# Altium PCB PCB2.PcbDoc
Units mm, origin at the board's own origin, x right, y up, seen from the top; angles counter-clockwise.
Board outline 227.61 x 40.77 mm, 4 copper layers (Top Layer, Layer 1, Layer 2, Bottom Layer), stack 0.467 mm thick; 71 components, 58 nets, 244 pads, 87 vias.
Unrouted connection lines stored in the file: 1.
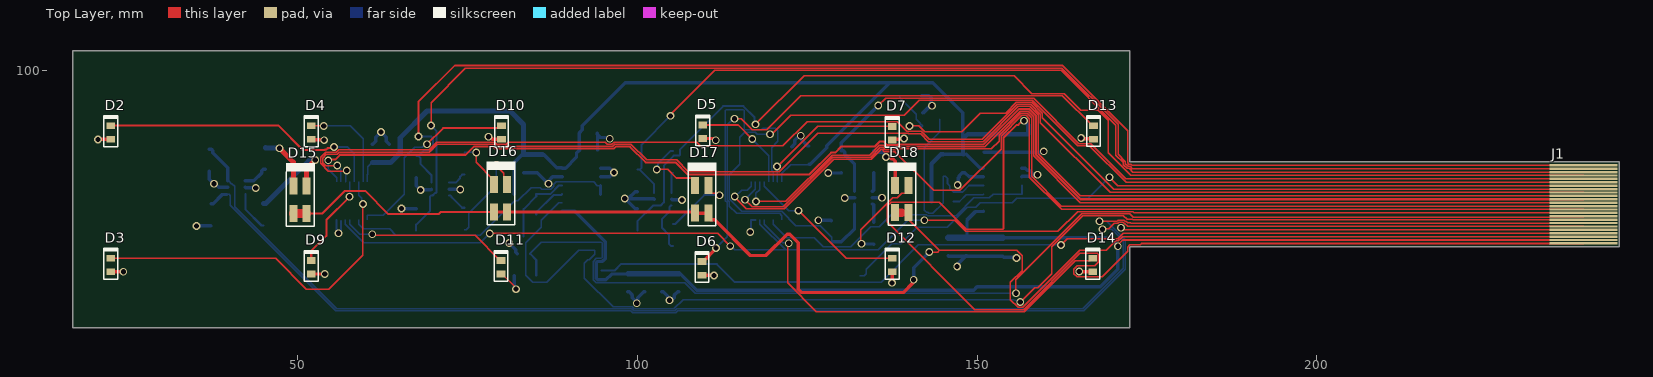
[diagram p0: Top Layer view]
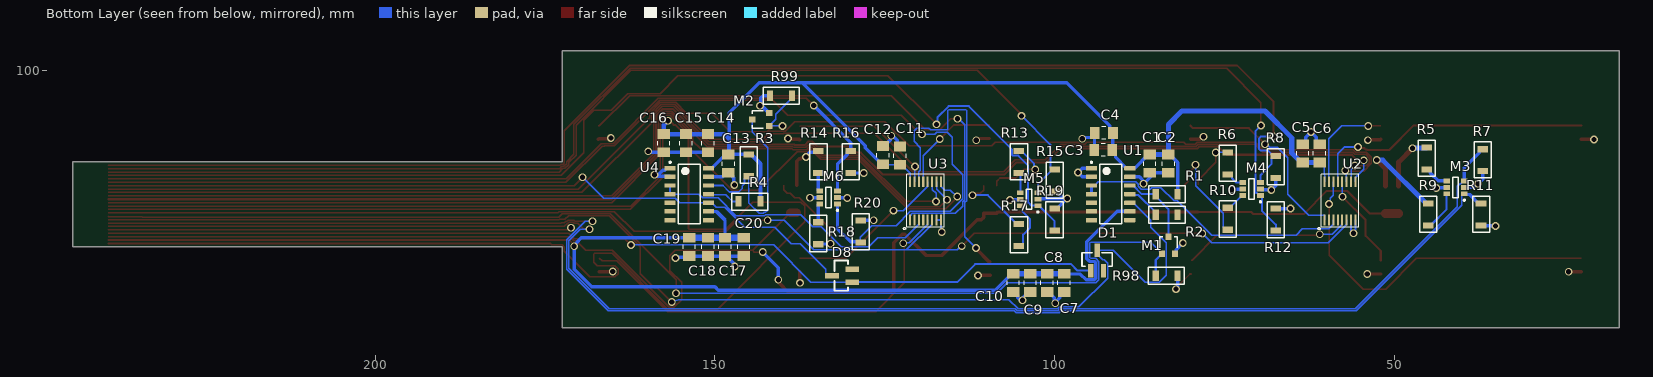
[diagram p1: Bottom Layer view, seen from below]
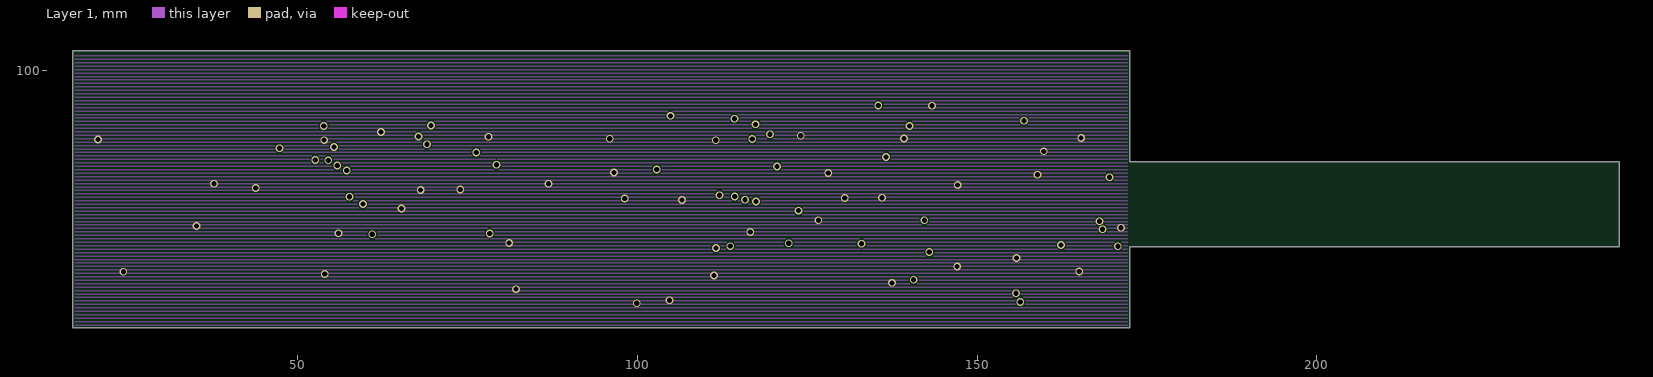
[diagram p2: Layer 1]
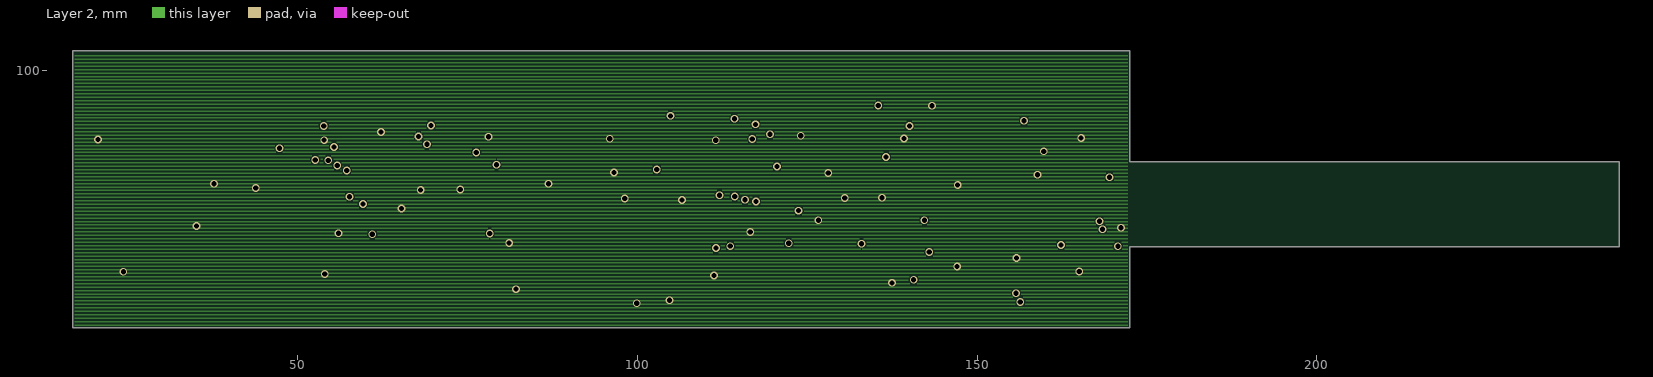
[diagram p3: Layer 2]
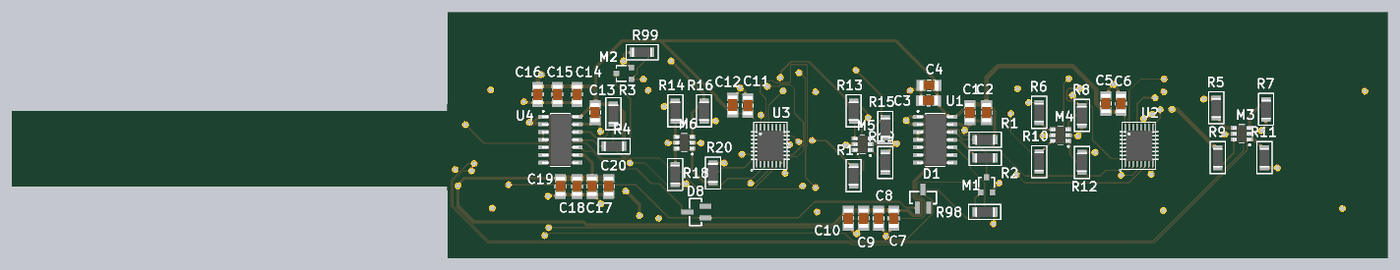
[diagram p4: 3D render of the assembled board from below, using the file's embedded part models]

## Layer stack, top to bottom
Top Stiffener: core 0.1, Core-009, Dk 4.5
Top Solder: solder mask 0.05, FC-001, Dk 4
Top Solder: solder mask 0.012, FC-001, Dk 4
Top Solder: solder mask 0.012, FC-001, Dk 4
Top Solder: solder mask 0.0127, Solder Resist, Dk 3.3
Top Layer: signal copper 0.035
Adhesive 1: prepreg 0.013, PP-006, Dk 4.1
Polymide: core 0.025, Core-009, Dk 4.5
Layer 1: signal copper 0.035
Adhesive 2: prepreg 0.013, PP-006, Dk 4.1
Dielectric 1: core 0.025, Core-009, Dk 4.5
Adhesive 3: prepreg 0.013, PP-006, Dk 4.1
Layer 2: signal copper 0.035
Dielectric 2: prepreg 0.025, PP-006, Dk 4.1
Adhesive 4: prepreg 0.013, PP-006, Dk 4.1
Bottom Layer: signal copper 0.035
Bottom PI Coverlay: solder mask 0.012, FC-001, Dk 4
Bottom PI Coverlay: solder mask 0.012, FC-001, Dk 4
Bottom PI Coverlay: solder mask 0.05, FC-001, Dk 4
Bottom Stiffener: core 0.1, Core-009, Dk 4.5

## Board outline
16.891,62.103 172.466,62.103 172.466,74 244.5,74 244.5,86.5 234,86.5 172.466,86.5 172.466,102.87 16.891,102.87
board region "Layer Stack Region 2": 244.5,86.5 234,86.5 234,74 244.5,74
board region "Default Layer Stack Region": 16.891,62.103 172.466,62.103 172.466,102.87 16.891,102.87
board region "Layer Stack Region 1": 172.466,74 234,74 234,86.5 172.466,86.5

## Design rules (kind name [scope] priority, off if disabled: settings)
BoardOutlineClearance [All] p1: gap=0.2 ignorepadtopadclearanceinfootprint=FALSE except(0: Track-SplitContinuation)
Clearance [All] p1: gap=0.102 ignorepadtopadclearanceinfootprint=TRUE except(0.127: Arc-Via Track-Via SMDPad-Via THPad-Via Via-Via Via-Fill Via-Poly Via-Region Via-Text; 0.254: Arc-Hole Track-Hole SMDPad-Hole THPad-Hole Via-Hole Fill-Hole Poly-Hole Region-Hole Text-Hole)
ComponentClearance [All] p1: gap=0.102 collisioncheckmode=3 verticalgap=0.102 showdistances=TRUE
DiffPairsRouting [All] p1: maxlimit=0.102 minlimit=0.102 mostfreqgap=0.102 toplayer_minwidth=0.102 toplayer_maxwidth=1816.048 toplayer_prefwidth=0.102 midlayer1_minwidth=0.102 midlayer1_maxwidth=1816.048 midlayer1_prefwidth=0.102 midlayer2_minwidth=0.102 midlayer2_maxwidth=1816.048 midlayer2_prefwidth=0.102 bottomlayer_minwidth=0.102 bottomlayer_maxwidth=1816.048 bottomlayer_prefwidth=0.102 substack1={5583BB25-6BBB-4077-B990-A626FA35176B} toplayer_{5583bb25-6bbb-4077-b990-a626fa35176b}_minwidth=0.381 toplayer_{5583bb25-6bbb-4077-b990-a626fa35176b}_maxwidth=0.381 toplayer_{5583bb25-6bbb-4077-b990-a626fa35176b}_prefwidth=0.381 midlayer1_{5583bb25-6bbb-4077-b990-a626fa35176b}_minwidth=0.381 midlayer1_{5583bb25-6bbb-4077-b990-a626fa35176b}_maxwidth=0.381 midlayer1_{5583bb25-6bbb-4077-b990-a626fa35176b}_prefwidth=0.381 midlayer2_{5583bb25-6bbb-4077-b990-a626fa35176b}_minwidth=0.381 midlayer2_{5583bb25-6bbb-4077-b990-a626fa35176b}_maxwidth=0.381 midlayer2_{5583bb25-6bbb-4077-b990-a626fa35176b}_prefwidth=0.381 bottomlayer_{5583bb25-6bbb-4077-b990-a626fa35176b}_minwidth=0.381 bottomlayer_{5583bb25-6bbb-4077-b990-a626fa35176b}_maxwidth=0.381 bottomlayer_{5583bb25-6bbb-4077-b990-a626fa35176b}_prefwidth=0.381 substack2={EBE5391E-56E2-4C1D-A29B-103A0F1B4C26} toplayer_{ebe5391e-56e2-4c1d-a29b-103a0f1b4c26}_minwidth=0.381 toplayer_{ebe5391e-56e2-4c1d-a29b-103a0f1b4c26}_maxwidth=0.381 toplayer_{ebe5391e-56e2-4c1d-a29b-103a0f1b4c26}_prefwidth=0.381 midlayer1_{ebe5391e-56e2-4c1d-a29b-103a0f1b4c26}_minwidth=0.381 midlayer1_{ebe5391e-56e2-4c1d-a29b-103a0f1b4c26}_maxwidth=0.381 midlayer1_{ebe5391e-56e2-4c1d-a29b-103a0f1b4c26}_prefwidth=0.381 midlayer2_{ebe5391e-56e2-4c1d-a29b-103a0f1b4c26}_minwidth=0.381 midlayer2_{ebe5391e-56e2-4c1d-a29b-103a0f1b4c26}_maxwidth=0.381 midlayer2_{ebe5391e-56e2-4c1d-a29b-103a0f1b4c26}_prefwidth=0.381 bottomlayer_{ebe5391e-56e2-4c1d-a29b-103a0f1b4c26}_minwidth=0.381 bottomlayer_{ebe5391e-56e2-4c1d-a29b-103a0f1b4c26}_maxwidth=0.381 bottomlayer_{ebe5391e-56e2-4c1d-a29b-103a0f1b4c26}_prefwidth=0.381 substack3={3CFEAB7B-F632-4D68-969C-E962D5EEF7A6} toplayer_{3cfeab7b-f632-4d68-969c-e962d5eef7a6}_minwidth=0.381 toplayer_{3cfeab7b-f632-4d68-969c-e962d5eef7a6}_maxwidth=0.381 toplayer_{3cfeab7b-f632-4d68-969c-e962d5eef7a6}_prefwidth=0.381 midlayer1_{3cfeab7b-f632-4d68-969c-e962d5eef7a6}_minwidth=0.381 midlayer1_{3cfeab7b-f632-4d68-969c-e962d5eef7a6}_maxwidth=0.381 midlayer1_{3cfeab7b-f632-4d68-969c-e962d5eef7a6}_prefwidth=0.381 midlayer2_{3cfeab7b-f632-4d68-969c-e962d5eef7a6}_minwidth=0.381 midlayer2_{3cfeab7b-f632-4d68-969c-e962d5eef7a6}_maxwidth=0.381 midlayer2_{3cfeab7b-f632-4d68-969c-e962d5eef7a6}_prefwidth=0.381 bottomlayer_{3cfeab7b-f632-4d68-969c-e962d5eef7a6}_minwidth=0.381 bottomlayer_{3cfeab7b-f632-4d68-969c-e962d5eef7a6}_maxwidth=0.381 bottomlayer_{3cfeab7b-f632-4d68-969c-e962d5eef7a6}_prefwidth=0.381 substack4={7D3F5522-6F84-4533-BB2A-A3B8BDBF7E25} toplayer_{7d3f5522-6f84-4533-bb2a-a3b8bdbf7e25}_minwidth=0.381 toplayer_{7d3f5522-6f84-4533-bb2a-a3b8bdbf7e25}_maxwidth=0.381 toplayer_{7d3f5522-6f84-4533-bb2a-a3b8bdbf7e25}_prefwidth=0.381 midlayer1_{7d3f5522-6f84-4533-bb2a-a3b8bdbf7e25}_minwidth=0.381 midlayer1_{7d3f5522-6f84-4533-bb2a-a3b8bdbf7e25}_maxwidth=0.381 midlayer1_{7d3f5522-6f84-4533-bb2a-a3b8bdbf7e25}_prefwidth=0.381 midlayer2_{7d3f5522-6f84-4533-bb2a-a3b8bdbf7e25}_minwidth=0.381 midlayer2_{7d3f5522-6f84-4533-bb2a-a3b8bdbf7e25}_maxwidth=0.381 midlayer2_{7d3f5522-6f84-4533-bb2a-a3b8bdbf7e25}_prefwidth=0.381 bottomlayer_{7d3f5522-6f84-4533-bb2a-a3b8bdbf7e25}_minwidth=0.381 bottomlayer_{7d3f5522-6f84-4533-bb2a-a3b8bdbf7e25}_maxwidth=0.381 bottomlayer_{7d3f5522-6f84-4533-bb2a-a3b8bdbf7e25}_prefwidth=0.381 substack5={1F673AEE-C4FD-4919-8B33-ACA80A65BA25} toplayer_{1f673aee-c4fd-4919-8b33-aca80a65ba25}_minwidth=0.381 toplayer_{1f673aee-c4fd-4919-8b33-aca80a65ba25}_maxwidth=0.381 toplayer_{1f673aee-c4fd-4919-8b33-aca80a65ba25}_prefwidth=0.381 midlayer1_{1f673aee-c4fd-4919-8b33-aca80a65ba25}_minwidth=0.381 midlayer1_{1f673aee-c4fd-4919-8b33-aca80a65ba25}_maxwidth=0.381 midlayer1_{1f673aee-c4fd-4919-8b33-aca80a65ba25}_prefwidth=0.381 midlayer2_{1f673aee-c4fd-4919-8b33-aca80a65ba25}_minwidth=0.381 midlayer2_{1f673aee-c4fd-4919-8b33-aca80a65ba25}_maxwidth=0.381 midlayer2_{1f673aee-c4fd-4919-8b33-aca80a65ba25}_prefwidth=0.381 bottomlayer_{1f673aee-c4fd-4919-8b33-aca80a65ba25}_minwidth=0.381 bottomlayer_{1f673aee-c4fd-4919-8b33-aca80a65ba25}_maxwidth=0.381 bottomlayer_{1f673aee-c4fd-4919-8b33-aca80a65ba25}_prefwidth=0.381 maxuncoupledlength=12.7
Height [All] p1: minheight=0 maxheight=1816.048 prefheight=12.7
HoleSize [All] p1: absolutevalues=TRUE maxlimit=6.3 minlimit=0.2 maxpercent=80.000 minpercent=20.000
HoleToHoleClearance [All] p1: gap=0.254 allowstackedmicrovias=FALSE
MinimumAnnularRing [All] p1: minimumring=0.152
MinimumSolderMaskSliver [All] p1: minsoldermaskwidth=0.152
PlaneClearance [All] p1: clearance=0.102
PlaneConnect PlaneConnectPowerPads [InPadClass('PowerPads')] p1: planeconnectstyle=Direct reliefexpansion=0.508 reliefentries=4 reliefconductorwidth=0.254 reliefairgap=0.254
PlaneConnect [All] p2: pad.planeconnectstyle=Relief pad.reliefexpansion=0.3 pad.reliefentries=4 pad.reliefconductorwidth=0.102 pad.reliefairgap=0.102 via.planeconnectstyle=Direct via.reliefexpansion=0.3 via.reliefentries=4 via.reliefconductorwidth=0.127 via.reliefairgap=0.127
PolygonConnect PolygonConnectPowerPads [All vs (InPadClass('PowerPads'))] p1: connectstyle=Direct reliefconductorwidth=0.254 reliefentries=4 polygonreliefangle="90 Angle" airgapwidth=0.254
PolygonConnect [All] p2: thpad.connectstyle=Relief thpad.reliefconductorwidth=0.102 thpad.reliefentries=4 thpad.polygonreliefangle="90 Angle" thpad.airgapwidth=0.102 smdpad.connectstyle=Relief smdpad.reliefconductorwidth=0.102 smdpad.reliefentries=4 smdpad.polygonreliefangle="90 Angle" smdpad.airgapwidth=0.102 via.connectstyle=Direct via.reliefconductorwidth=0.127 via.reliefentries=4 via.polygonreliefangle="90 Angle" via.airgapwidth=0.127
RoutingVias [All] p1: holewidth=0.2 width=0.45 viastyle="Through Hole" minholewidth=0.2 minwidth=0.45 maxholewidth=6.3 maxwidth=6.55
SilkToSilkClearance [All] p1: silktosilkclearance=0.127
SilkToSolderMaskClearance [IsPad] p1: minsilkscreentomaskgap=0.127 clearancetoexposedcopper=TRUE
SolderMaskExpansion [All] p1: expansion=0.051 istentingtop=FALSE
UnRoutedNet [All] p1: checkbadconnections=TRUE
Width Width_4mil [All] p1: maxlimit=25.4 minlimit=0.102 preferedwidth=0.102 substack1={5583BB25-6BBB-4077-B990-A626FA35176B} substack2={EBE5391E-56E2-4C1D-A29B-103A0F1B4C26} substack3={3CFEAB7B-F632-4D68-969C-E962D5EEF7A6} substack4={7D3F5522-6F84-4533-BB2A-A3B8BDBF7E25} substack5={1F673AEE-C4FD-4919-8B33-ACA80A65BA25} minimp=50.000000 maximp=50.000000 favimp=50.000000
19 further rules are at their usual default settings.

## Classes and differential pairs
component class MultiChannelFlex: C1 C2 C3 C4 C5 C6 C7 C8 C9 C10 C11 C12 C13 C14 C15 C16 C17 C18 C19 C20 D1 D2 D3 D4 D5 D6 D7 D9 D10 D11 D12 D13 D14 J1 M1 M2 R1 R2 R3 R4 R98 R99 U1 U2 U3 U4
component class MultiChannelFlex_LED: D15 D16 D17 D18 M3 M4 M5 M6 R5 R6 R7 R8 R9 R10 R11 R12 R13 R14 R15 R16 R17 R18 R19 R20

## Components (designator, comment, footprint, x,y, rotation, side; value= is the part's Value field where it differs from the comment)
C1 "0.1uF" CAPC3216X180N 86,86.25 r90 bottom value="0.10 μF"
C2 "0.1uF" CAPC3216X180N 83.25,86.25 r270 bottom value="0.10 μF"
C3 "10uF" CAPC3216X180N 92.836,88.25 r0 bottom
C4 "10uF" CAPC3216X180N 92.75,90.75 r0 bottom
C5 "0.1uF" CAPC3216X180N 63.5,87.75 r90 bottom value="0.10 μF"
C6 "10uF" CAPC3216X180N 61,87.75 r90 bottom
C7 "0.1uF" CAPC3216X180N 98.6,68.71 r270 bottom value="0.10 μF"
C8 "0.1uF" CAPC3216X180N 101.1,68.71 r270 bottom value="0.10 μF"
C9 "10uF" CAPC3216X180N 103.6,68.71 r270 bottom
C10 "10uF" CAPC3216X180N 106.1,68.71 r270 bottom
C11 "0.1uF" CAPC3216X180N 122.744,87.408 r90 bottom value="0.10 μF"
C12 "10uF" CAPC3216X180N 125.25,87.5 r90 bottom
C13 "0.1uF" CAPC3216X180N 148,86.25 r90 bottom value="0.10 μF"
C14 "0.1uF" CAPC3216X180N 151,89.25 r270 bottom value="0.10 μF"
C15 "10uF" CAPC3216X180N 154.25,89.25 r270 bottom
C16 "10uF" CAPC3216X180N 157.5,89.25 r270 bottom
C17 "0.1uF" CAPC3216X180N 148.5,74 r270 bottom value="0.10 μF"
C18 "0.1uF" CAPC3216X180N 151,74 r270 bottom value="0.10 μF"
C19 "10uF" CAPC3216X180N 153.75,74 r270 bottom
C20 "10uF" CAPC3216X180N 145.75,74 r270 bottom
D1 "BAT54LT1G" BAT54LT1 93.75,72 r180 bottom
D2 "HSD9-B170" HSD9-B170 22.5,91 r90 top
D3 "HSD9-B170" HSD9-B170 22.5,71.5 r90 top
D4 "HSD9-B170" HSD9-B170 52,91 r90 top
D5 "HSD9-B170" HSD9-B170 109.608,91.112 r90 top
D6 "HSD9-B170" HSD9-B170 109.5,71 r90 top
D7 "HSD9-B170" HSD9-B170 137.495,90.894 r90 top
D8 "BAT54LT1G" BAT54LT1 131.25,69.75 r90 bottom
D9 "HSD9-B170" HSD9-B170 52,71.168 r90 top
D10 "HSD9-B170" HSD9-B170 80,91 r90 top
D11 "HSD9-B170" HSD9-B170 79.924,71.178 r90 top
D12 "HSD9-B170" HSD9-B170 137.5,71.5 r90 top
D13 "HSD9-B170" HSD9-B170 167.125,91.003 r90 top
D14 "HSD9-B170" HSD9-B170 167,71.5 r90 top
D15 "SMT735D/850D" SMT735D_850D 49.369,82.569 r0 top
D16 "SMT735D/850D" SMT735D_850D 78.89,82.787 r0 top
D17 "SMT735D/850D" SMT735D_850D 108.5,82.619 r0 top
D18 "SMT735D/850D" SMT735D_850D 137.931,82.678 r0 top
J1 "FPC Connector" PCBComponent_1 240.863,74.325 r90 top
M1 "2N7002" STM-SOT-23-3_V 83.25,74.25 r180 bottom
M2 "2N7002" STM-SOT-23-3_V 143.25,92.75 r90 bottom
M3 "NDC7002N" FAIR-MA06A_V 41,82.75 r180 bottom
M4 "NDC7002N" FAIR-MA06A_V 71,82.5 r180 bottom
M5 "NDC7002N" FAIR-MA06A_V 103.75,81 r180 bottom
M6 "NDC7002N" FAIR-MA06A_V 133.25,81.25 r180 bottom
R1 "1k" R1206 83.5,81.75 r180 bottom
R2 "1k" R1206 83.5,78.75 r180 bottom
R3 "1k" R1206 145,86 r90 bottom
R4 "1k" R1206 144.9,80.675 r180 bottom
R5 "26.1" R1206 45.25,87 r90 bottom value=26.1Ω
R6 "26.1" R1206 74.549,86.25 r90 bottom value=26.1Ω
R7 "1k" R1206 37,86.75 r90 bottom
R8 "1k" R1206 67.476,85.75 r90 bottom
R9 "36" R1206 45,78.75 r90 bottom
R10 "36" R1206 74.524,78.135 r270 bottom
R11 "1k" R1206 37.25,78.75 r90 bottom
R12 "1k" R1206 67.451,78 r270 bottom
R13 "26.1" R1206 105.25,86.5 r90 bottom value=26.1Ω
R14 "26.1" R1206 134.75,86.5 r90 bottom value=26.1Ω
R15 "1k" R1206 100,83.75 r90 bottom
R16 "1k" R1206 130,86.5 r90 bottom
R17 "36" R1206 105.25,75.75 r90 bottom
R18 "36" R1206 134.75,76 r270 bottom
R19 "1k" R1206 100,78 r270 bottom
R20 "1k" R1206 128.5,76.25 r270 bottom
R98 "1k" R1206 83.5,69.75 r0 bottom
R99 "1k" R1206 140.25,96.25 r180 bottom
U1 "IVC102" D0014A_M 91.75,81.75 r180 bottom
U2 "8x1 Analog MUX TSSOP16" TSSOP-16 58,80.75 r180 bottom
U3 "8x1 Analog MUX TSSOP16" TSSOP-16 119,80.75 r180 bottom
U4 "IVC102" D0014A_M 153.75,81.75 r180 bottom

## Footprints (in the part's own frame and the unit in brackets; to place one, negate y for a bottom-side part, rotate by r counter-clockwise, add the part's x,y. Pads: shape width x height; smd on the part's side, far side on the other; paste and mask are expansions set on the pad)
BAT54LT1 [mm]
  rect 0.8x2 smd: 1(-0.95,-1.503) 2(0.95,-1.503) 3(-0.001,1.503)
  silkscreen extent -2.22,-0.86 2.23,1.14
CAPC3216X180N [mm]
  rect 1.44x1.82 smd: 1(-1.336,0) 2(1.336,0)
  silkscreen extent -0.29,-0.9 0.29,0.9, body extent -1.6,-0.8 1.6,0.8, height 1.8
D0014A_M [mm] "SOIC, 14-Leads, Body 8.75x4mm, Pitch 1.27mm, IPC Low Density"
  rrect15% 1.65x0.65 smd: 1(-2.825,3.81) 2(-2.825,2.54) 3(-2.825,1.27) 4(-2.825,0) 5(-2.825,-1.27) 6(-2.825,-2.54) 7(-2.825,-3.81) 8(2.825,-3.81) 9(2.825,-2.54) 10(2.825,-1.27) 11(2.825,0) 12(2.825,1.27) 13(2.825,2.54) 14(2.825,3.81)
  silkscreen extent -2.95,-4.38 1.6,4.81, body extent -3.02,-4.32 3.02,4.32, height 1.59
FAIR-MA06A_V [mm] "SOT23, 6-Leads, Body 3x1.7mm, Pitch 0.95mm"
  rect 1x0.7 smd: 1(1.3,-0.95) 2(1.3,0) 3(1.3,0.95) 4(-1.3,0.95) 5(-1.3,0) 6(-1.3,-0.95)
  silkscreen extent -0.4,-2 1.42,1.5, body extent -1.5,-1.5 1.5,1.5, height 1.1
HSD9-B170 [mm]
  rect 1x1.3 smd: 1(-1.168,0) 2(0.825,0)
  silkscreen extent -2.24,-1.02 2.26,1
PCBComponent_1 [mm]
  rect 0.35x10 smd mask+0: 1(0.175,1.613) 2(0.675,1.613) 3(1.175,1.613) 4(1.675,1.613) 5(2.175,1.613) 6(2.675,1.613) 7(3.175,1.613) 8(3.676,1.613) 9(4.175,1.613) 10(4.675,1.613) 11(5.175,1.613) 13(6.175,1.613) 14(6.675,1.612) 15(7.175,1.613) 16(7.675,1.613) 17(8.175,1.613) 18(8.676,1.613) 19(9.175,1.613) 20(9.675,1.611) 21(10.176,1.619) 22(10.675,1.613) 23(11.175,1.613)
  rect 0.35x10 smd paste+0 mask+0: 12(5.675,1.613) 24(11.674,1.616)
R1206 [mm]
  rect 0.9x1.55 smd: 1(-1.615,0) 2(1.615,0)
  silkscreen extent -2.62,-1.27 2.69,1.24, body extent -1.6,-0.81 1.6,0.79, height 0.6
SMT735D_850D [mm]
  rect 1.2x2.5 smd: 1(0,-3.658) 2(0,0.381) 3(1.941,-3.655) 4(1.941,0.383)
  silkscreen extent -1.12,-5.51 3.15,3.76
STM-SOT-23-3_V [mm] "SOT23, 3-Leads, Body 3.016x2.8mm, Pitch 0.95mm"
  rect 0.9x0.95 smd: 1(-0.95,-1.25) 2(0.95,-1.25) 3(0,1.25)
  silkscreen extent -1.3,-0.38 1.3,1.25
TSSOP-16 [mm]
  rect 0.3x1.55 smd: 1(-2.275,-2.8) 2(-1.625,-2.8) 3(-0.975,-2.8) 4(-0.325,-2.8) 5(0.325,-2.8) 6(0.975,-2.8) 7(1.625,-2.8) 8(2.275,-2.8) 9(2.275,2.8) 10(1.625,2.8) 11(0.975,2.8) 12(0.325,2.8) 13(-0.325,2.8) 14(-0.975,2.8) 15(-1.625,2.8) 16(-2.275,2.8)
  silkscreen extent -3.25,-4.22 2.76,3.9, body extent -3.2,-2.5 3.2,2.5, height 1.1

## Part data
C1 C2 C5 C7 C8 C11 C13 C14 C17 C18: library part C1206C104K5RAC7210, "1206", Capacitance="0.10 μF", Manufacturer=KEMET, Package=C1206C-EB, Temperature="-55°C to +150°C", Temperature Characteristic=X7R, Temperature Coefficient=15%, Temperature Range High=+150°C, Temperature Range Low=-55°C, Tolerance=0.1, Voltage Rating="50 V", Automotive=Yes, Automotive Grade="Grade 0", Category=Cap, ComponentLink2Description=Datasheet, ComponentLink2URL=https://content.kemet.com/datasheets/KEM_C1007_X8R_ULTRA_150C_SMD.pdf, Device Class L1="Passive Components", Device Class L2=Capacitors, Device Class L3="Ceramic Capacitors", Digikey Description="CAP CER 0.1UF 50V X7R 1206", Height=0.88mm, Ipc Land Pattern Name=CAPC320160X78, Lead Free=Yes, Manufacturer Part Number=C1206C104K5RAC7210, Material=Ceramic, Mouser Description="Multilayer Ceramic Capacitors MLCC - SMD/SMT 50volts 0.1uF X7R 10%", Octopart=https://octopart.com/c1206c104k5rac7210-kemet-3919856, RoHS=TRUE
C3 C4 C6 C9 C10 C12 C15 C16 C19 C20: library part CL31B106KOHNNWE, "1206"
D1 D8: library part BAT54L, "Schottky Barrier Diode, 3-Pin SOT-23, Pb-Free, Tape and Reel", Manufacturer="On Semiconductor", ComponentLink1Description="Manufacturer URL", ComponentLink1URL=http://www.onsemi.com/, ComponentLink2Description=Datasheet, ComponentLink2URL=http://www.onsemi.cn/pub_link/Collateral/BAT54LT1-D.PDF, ComponentLink3Description="Package Specification", ComponentLink3URL=http://www.onsemi.cn/pub_link/Collateral/318-08.PDF, Configuration=Single, DatasheetVersion="Rev. 12", IFSM Max (A)=0.6, Mounting Technology="Surface Mount", PackageDescription="3-Pin Small Outline Transistor, Body 2.92 x 1.3 mm, Pitch 0.95 mm", PackageReference=SOT-23-3-318-08, PackageVersion="Rev. AP, 11/2009", Packing="Tape and Reel", PartNumber=BAT54LT1G, RoHS=TRUE, trr Max (ns)=5
J1: library part 2-1734592-4, "24 Position FPC Connector Contacts, Bottom 0.020\" _0.50mm_ Surface Mount, Right Angle", Package=None, Availability=Unavailable, MF="TE Connectivity", MP=2-1734592-4, Price=None, SnapEDA_Link=https://www.snapeda.com/parts/2-1734592-4/TE%20Connectivity/view-part/4788511/?ref=snap
M1 M2: library part 2N7002-TP, "N-channel 60 V, 1.8 Ohm, 0.35 A STripFET(TM) II Power MOSFET, SOT23", Manufacturer=STMicroelectronics, ComponentLink1Description="Manufacturer URL", ComponentLink1URL=http://www.st.com/, ComponentLink2Description=Datasheet, ComponentLink2URL=http://www.st.com/st-web-ui/static/active/en/resource/technical/document/datasheet/CD00005134.pdf, DatasheetVersion="Rev. 9, 11/2008", Mounting Technology="Surface Mount", PackageDescription="3-Pin SOT23, 3.016 x 2.8 mm Body, 0.95 mm Pitch", PackageReference=SOT-23, PartNumber=2N7002
R1 R2 R3 R4 R7 R8 R11 R12 R15 R16 R19 R20 R98 R99: library part RT1206BRD071KL, "1206 1kOhm"
R5 R6 R13 R14: library part RQ73C2B26R1BTD, "1206 26.1 Ohm", Manufacturer=TE, Package=RQ732B, Power Rating=0.4W, Resistance=26.1Ω, Temperature="-55°C to +155°C", Temperature Coefficient=10ppm/°C, Temperature Range High=+155°C, Temperature Range Low=-55°C, Tolerance=0.1%, Voltage Rating=200V, Automotive=Yes, Automotive Grade="Grade 0", Category=Res, ComponentLink2Description=Datasheet, ComponentLink2URL=https://www.te.com/commerce/DocumentDelivery/DDEController?Action=showdoc&DocId=Data+Sheet%7F1773270-2%7FA%7Fpdf%7FEnglish%7FENG_DS_1773270-2_A.pdf%7F9-2176388-167, Composition="Thin Film", Device Class L1="Passive Components", Device Class L2=Resistors, Device Class L3="Chip SMD Resistors", Height=0.75mm, Ipc Land Pattern Name=RESC310160X60, Lead Free=Yes, Manufacturer Part Number=RQ73C2B26R1BTD, Octopart=https://octopart.com/rq73c2b26r1btd-te+connectivity-93911368, RoHS=TRUE, Series=RQ73
R9 R10 R17 R18: library part RT1206BRD0736RL, "1206 36 Ohm", Manufacturer=Yageo, Max Operating Temperature=155°C, Min Operating Temperature=-55°C, Package Height=0.55mm, Package Length=3.1mm, Package Style=SMTMeter, Package Width=1.6mm, Rated Power Dissipation (P)=250mW, Rated Temperature=70°C, Resistance=36R, Resistor Type="FIXED RESISTOR", Temperature Coefficient=25ppm/°C, Tolerance=0.1%, Working Voltage=200V, Additional Feature="HIGH PRECISION", Category="Chip SMD Resistors", ComponentLink1Description=https://datasheet.ciiva.com:443/pdfs/VipMasterIC/IC/YAGO/YAGO-S-A0008510989/YAGO-S-A0008510989-1.pdf?src-supplier=IHS+Markit, ComponentLink1URL=https://datasheet.ciiva.com:443/pdfs/VipMasterIC/IC/YAGO/YAGO-S-A0008510989/YAGO-S-A0008510989-1.pdf?src-supplier=IHS+Markit, ComponentLink2Description=https://datasheet.ciiva.com/2587/pyu-rt-1-to-0-05-rohs-l-5-2587658.pdf?src-supplier=Digikey, ComponentLink2URL=https://datasheet.ciiva.com/2587/pyu-rt-1-to-0-05-rohs-l-5-2587658.pdf?src-supplier=Digikey, ComponentLink3Description=https://datasheet.ciiva.com/12811/pyu-rt-1-to-0-05-rohs-l-4-12811975.pdf?src-supplier=Mouser, ComponentLink3URL=https://datasheet.ciiva.com/12811/pyu-rt-1-to-0-05-rohs-l-4-12811975.pdf?src-supplier=Mouser, Construction=Chip, Manufacturer Part Number=RT1206BRD0736RL, Mount="Surface Mount", Number of Pins=2, Packaging="Tape and Reel", Pricing 1="1=0.33, 10=0.241, 50=0.1868, 100=0.166, 500=0.1245, 1000=0.10938 (USD)", Reach SVHC Compliant=Yes, RoHS=Yes, RoHS Compliant=Yes, Size Code=1206, Stock 1=9860, Supplier 1=Digikey, Technology="THIN FILM", Termination=Wraparound
U2 U3: library part 74HCT4051PW

## Via types
v1: diameter 1.143, hole 0.762, Top Layer to Bottom Layer, 87 vias

## Nets (pads, with @x,y where several pads share a name; then routed paths per layer and width w, separated by ;. In a path a pad name is that pad's centre, name@x,y a point inside that pad or via, vN(x,y) a via of type N, cw(c..) or ccw(c..) an arc to the next point about the centre after c; other vN are vias at no path point)
1a: D2.2 U2.13 | length 42.1
  Top Layer w0.3: D2.2 47.2,91.825 50.775,88.25 53.954,88.25 54.006,88.302 54.23,88.302 54.467,88.539 55.189,88.539 v1(55.35,88.7)
  Bottom Layer w0.2: U2.13 58.325,87.7
  Bottom Layer w0.3: v1(55.35,88.7) 57.325,88.7 58.325,87.7
1b: D5.2 U3.13 | length 15.5
  Top Layer w0.254: D5.2 114.813,91.937 v1(116.9,89.85)
  Bottom Layer w0.2: v1(116.9,89.85) 119.325,87.425 U3.13
2a: D3.2 U2.14 | length 51.9
  Top Layer w0.2: D3.2 46.75,72.325 51.3,67.775 54.6,67.775 59.6,72.775 v1@59.6,80.075
  Bottom Layer w0.2: U2.14 58.975,81.6 59.42,81.155 59.42,80.48 v1(59.6,80.3)
2b: D6.2 U3.14 | length 42.9
  Top Layer w0.5: D6.2 109.65,71.825 111.55,73.725 v1(111.55,73.825)
  Bottom Layer w0.2: v1(111.55,73.825) 113.2,75.475 113.2,80.543 112.925,80.818 112.925,94.083 113.042,94.2 115.577,94.2 115.694,94.083 115.694,91.317 115.811,91.2 118.25,91.2 118.525,91.475 120.25,91.475 120.675,91.05 120.675,89.525 119.752,88.601 119.752,85.278 119.975,85.054 U3.14
3a: D4.2 U2.15 | length 14.8
  Top Layer w0.2: D4.2 52.025,91.8 v1(53.85,91.8)
  Bottom Layer w0.2: v1(53.85,91.8) 57.725,91.8 59.625,89.9 U2.15
3b: D7.2 U3.15 | length 21.7
  Top Layer w0.2: v1(120.55,85.827) 120.631,85.827 126.524,91.719 D7.2
  Bottom Layer w0.2: v1(120.55,85.827) 120.588,85.789 120.588,83.588 U3.15
3V3: D15.1 D15.3 D16.1 D16.3 D17.1 D17.3 D18.1 D18.3 J1.3 | length 230.8
  Top Layer w0.2: 138.901,79.022 139.711,78.212 144.446,73.477 ; v1(142.95,73.225) 144.195,73.225 144.446,73.477 ; J1.3 171.406,75.5 170.794,74.889 170.369,74.889 168.957,73.477 165.112,73.477 156.712,65.076 156.019,65.076 154.902,66.194 154.902,68.809 156.599,70.506 156.599,72.707 155.829,73.477 144.446,73.477
  Top Layer w0.3: D15.3@51.308,78.913 53.663,78.913 56.973,82.224 59.932,82.224 63.354,78.802 70.733,78.802 71.061,79.129 D16.1
  Top Layer w0.5: D16.1 80.828,79.129 D16.3 108.33,79.132 D17.1 D17.1@108.542,78.919 ; D17.1@108.586,78.964 D17.3 110.441,78.314 110.791,77.964 111.361,77.964 116.6,72.725 118.875,72.725 122.018,75.868 122.432,75.868 123.675,74.625 123.675,67.784 124.184,67.275 139.125,67.275 v1@140.525,68.675
  Top Layer w1.27: D15.1 D15.1 D15.3@51.308,78.913 ; D18.1 137.932,79.022 138.901,79.022
  Bottom Layer w0.5: v1(140.65,69.15) 140.65,70.925 v1(142.95,73.225)
4a: D9.2 U2.12 | length 13.9
  Top Layer w0.3: D9.2 52,73.4 54.225,75.625 54.225,77.95 v1(57.65,81.375)
  Bottom Layer w0.2: v1(57.65,81.375) 57.663,81.388 57.663,83.538 U2.12
4b: D12.2 U3.12 | length 23.8
  Top Layer w0.2: v1(123.725,79.325) 130.725,72.325 D12.2
  Bottom Layer w0.2: U3.12 118.675,82.925 122.275,79.325 v1(123.725,79.325)
5a: D10.2 U2.1 | length 29
  Top Layer w0.3: v1(69.022,89.099) 71.398,91.475 79.65,91.475 D10.2
  Bottom Layer w0.2: U2.1 60.275,78.575 60.325,78.625 62.575,78.625 65.7,81.75 65.7,87.099 67.251,88.65 68.318,88.65 68.767,89.099 v1(69.022,89.099)
5b: D13.2 U3.1 | length 79.5
  Top Layer w0.2: v1(114.275,92.85) 115.306,92.85 116.93,91.227 119.022,91.227 124.046,96.25 162.553,96.25 166.975,91.828 D13.2
  Bottom Layer w0.2: v1@113.902,92.627 113.227,91.952 113.227,80.943 113.502,80.668 113.502,79.989 114.583,78.908 114.602,78.927 120.923,78.927 121.275,78.575 U3.1
6a: D11.2 U2.5 | length 25.1
  Top Layer w0.2: v1(60.975,75.85) 61.15,75.675 76.102,75.675 79.774,72.003 D11.2
  Bottom Layer w0.2: U2.5 57.675,77.325 59.15,75.85 v1(60.975,75.85)
6b: D14.2 U3.5 | length 61.2
  Top Layer w0.2: v1(122.275,74.525) 122.1,74.35 122.1,68.72 126.347,64.473 156.961,64.473 164.413,71.925 166.6,71.925 D14.2
  Bottom Layer w0.2: U3.5 118.675,77.325 121.404,74.597 122.203,74.597 v1(122.275,74.525)
735-S1: J1.6 M3.3 R7.2 | length 229.3
  Top Layer w0.2: v1(168.457,76.59) 168.56,76.693 169.329,76.693 170.134,77.498 170.719,77.498 170.822,77.601 171.484,77.601 171.587,77.498 171.652,77.498 172.15,77 J1.6
  Bottom Layer w0.2: M3.3 39.85,83.7 40.248,83.302 40.323,83.302 40.725,82.9 40.725,79.9 55.723,64.902 99.143,64.902 99.444,64.6 105.504,64.6 105.806,64.902 165.54,64.902 171.498,70.86 171.498,74.902 169.81,76.59 v1(168.457,76.59)
  Bottom Layer w0.508: R7.2 37.325,88.365 37.521,88.169 37.521,87.844 39.7,85.665 M3.3
735-S2: J1.24 M4.3 R8.2 | length 198.5
  Top Layer w0.254: v1@67.775,90.7 67.775,95.325 73.15,100.7 162.543,100.7 172.139,91.104 172.139,86.365 172.331,86.173 172.644,86.173 172.818,85.999 J1.24
  Bottom Layer w0.3: R8.2 R8.2@67.801,87.365 ; v1(67.8,90.25) 69.625,90.25 69.903,89.972 69.903,88.382 69.728,88.206 68.642,88.206 R8.2@67.801,87.365 ; M4.3 69.7,84.558 68.101,86.157 68.101,87.065 R8.2@67.801,87.365
735-S3: J1.22 M5.3 R15.2 | length 160.9
  Top Layer w0.2: v1@104.575,93.2 111.375,100 162.352,100 170.426,91.926 170.426,87.501 171.509,86.417 171.509,86.104 172.07,85.543 172.383,85.543 172.466,85.46 172.926,85 J1.22
  Bottom Layer w0.3: R15.2 R15.2@100.325,85.365 ; M5.3 102.45,83.24 R15.2@100.325,85.365 ; v1(104.85,93.275) 100.625,89.05 100.625,85.665 R15.2@100.325,85.365
735-S4: J1.20 M6.3 R16.2 | length 125
  Top Layer w0.2: v1(135.45,94.8) 136.525,95.875 158.297,95.875 164.969,89.203 166.322,89.203 166.391,89.133 166.718,89.133 171.851,84 J1.20
  Bottom Layer w0.5: M6.3 131.95,86.165 130.525,87.59 130.525,87.915 130.325,88.115 R16.2 130,89.35 v1(135.45,94.8)
850-S1: J1.7 M3.1 R11.2 | length 226.5
  Top Layer w0.2: v1(168,77.775) 168.025,77.8 170.594,77.8 170.697,77.903 171.609,77.903 171.712,77.8 171.875,77.8 172.125,77.55 172.2,77.55 172.225,77.525 172.6,77.525 172.625,77.5 J1.7
  Bottom Layer w0.2: M3.1@39.604,81.704 39.946,81.704 40.1,81.55 40.1,80.098 55.598,64.6 99.018,64.6 99.319,64.298 105.629,64.298 105.931,64.6 165.665,64.6 171.8,70.735 171.8,75.026 169.052,77.775 v1(168,77.775)
  Bottom Layer w0.508: R11.2 37.575,80.365 38.914,81.704 M3.1@39.604,81.704
850-S2: J1.23 M4.1 R12.2 | length 201.2
  Top Layer w0.2: v1(69.625,91.85) 69.625,95.225 74.702,100.302 162.476,100.302 170.727,92.051 170.727,87.626 171.81,86.542 171.81,86.228 172.194,85.844 172.466,85.844 172.508,85.844 172.853,85.5 J1.23
  Bottom Layer w0.3: R12.2 67.451,77.251 69.45,79.25 69.45,81.35 69.65,81.55 M4.1 69.85,81.55 70.198,81.898 70.304,81.898 70.452,82.046 70.452,91.023 v1(69.625,91.85)
850-S3: J1.21 M5.1 R19.2 | length 164.8
  Top Layer w0.2: v1(117.375,92.025) 124.525,99.175 155.424,99.175 158.047,96.552 162.828,96.552 165.255,94.125 167.8,94.125 169.275,92.65 169.275,87.825 172.599,84.501 J1.21
  Bottom Layer w0.3: R19.2 100,77.75 102.3,80.05 M5.1 103.4,80.05 103.885,80.535 103.885,85.96 105.338,87.413 106.129,87.413 106.277,87.561 106.277,88.352 112.625,94.7 115.574,94.7 117.228,93.046 117.228,92.172 v1(117.375,92.025)
850-S4: J1.19 M6.1 R20.2 | length 167.3
  Top Layer w0.2: v1@119.55,90.375 122.55,93.375 139.244,93.375 141.443,95.573 158.137,95.573 164.809,88.902 166.197,88.902 166.266,88.832 166.593,88.832 171.925,83.5 J1.19
  Bottom Layer w0.2: v1(119.5,90.575) 117.669,90.575 117.37,90.873 115.794,90.873 115.044,90.123 115.044,86.119 113.528,84.603 113.528,81.068 115.368,79.228 121.207,79.228 123.334,77.101 126.898,77.101 128.615,75.385 R20.2@128.615,74.75
  Bottom Layer w0.5: R20.2@128.615,74.75 130.025,74.75 131.95,76.675 M6.1
+5V: C1.2 C2.1 C3.1 C4.1 C5.1 C6.1 C11.1 C12.1 C13.2 C14.1 C15.1 C16.1 J1.1 R1.2 R2.2 R3.2 R4.2 U1.14 U2.16 U3.16 U4.14 | length 334
  Top Layer w0.2: 153.875,76.717 153.743,76.585 148.41,76.585 144.421,80.575 137.35,80.575 136.792,80.016 136.792,77.658 149.675,64.775 156.837,64.775 165.088,73.027 167.734,73.027 167.852,72.909 167.852,71.741 167.334,71.224 164.744,71.224 164.226,70.706 164.226,70.044 164.694,69.577 168.384,69.577 172.141,73.333 172.141,73.958 172.466,74.283
  Top Layer w0.25: 172.466,74.283 172.508,74.325 174.015,74.325 174.19,74.5 J1.1
  Top Layer w0.3: 153.875,76.717 153.875,90.025 155.8,91.95 156.072,91.95 156.672,92.55 v1(156.9,92.55)
  Bottom Layer w0.2: U2.16 60.275,84.625 60.35,84.7 60.35,85.794 60.97,86.414 C6.1 ; U3.16 121.275,84.794 122.554,86.072 C11.1 125.158,86.072 C12.1
  Bottom Layer w0.5: R1.2 81.885,86.411 83.06,87.586 C2.1 ; C1.2 86.19,87.586 88.141,85.635 88.85,85.635 U1.14 89.425,85.56 91.03,87.165 91.03,87.78 C3.1 91.457,88.293 91.457,90.707 C4.1 91.884,91.22 91.884,91.834 98.225,98.175 137.15,98.175 ; C12.1 125.44,86.164 127.875,88.599 127.875,88.9 137.15,98.175 ; 147.9,89.4 147.9,89.875 147.9,93.75 143.475,98.175 137.15,98.175
  Bottom Layer w0.508: R3.2 C13.2@147.971,87.615 ; C13.2@148.37,87.615 150.425,85.56 U4.14
  Bottom Layer w0.635: R4.2 143.285,86.225 144.675,87.615 R3.2 ; 147.9,89.4 147.9,87.686 147.971,87.615 C13.2 ; 147.9,89.875 148.611,90.586 C14.1 C15.1 C16.1 157.5,91.943 156.9,92.543 v1(156.9,92.55)
  Bottom Layer w0.75: C6.1 63.69,86.414 65.096,87.82 65.096,90.046 69.025,93.975 81.275,93.975 83.25,92 C2.1 C1.2
-5V: D1.1 D8.1 J1.4 | length 149
  Top Layer w0.2: v1(162.35,74.275) 163.265,75.19 170.669,75.19 171.479,76 J1.4
  Bottom Layer w0.2: D8.1 135.85,68.8 141.325,74.275 v1(162.35,74.275)
  Bottom Layer w0.3: D1.1 96.622,70.497 97.575,71.45 111.7,71.45 114.35,68.8 D8.1
-15V: C7.1 C8.1 C9.1 C10.1 C17.1 C18.1 C19.1 C20.1 J1.2 U1.9 U4.9 | length 197.6
  Top Layer w0.254: v1(170.7,74.09) 170.7,74.275 171.425,75 J1.2
  Bottom Layer w0.5: U1.9 90.812,79.21 95.252,74.77 95.252,72.238 94.862,71.849 94.154,71.849 93.948,71.643 93.948,69.352 94.154,69.146 95.357,69.146 96.207,69.996 98.55,69.996 C7.1 ; C10.1 106.29,70.046 108.709,67.627 149.477,67.627 149.973,68.123 168.123,68.123 170.7,70.7 v1(170.7,74.09) ; C17.1 148.5,77.95 149.751,79.201 150.916,79.201 U4.9
  Bottom Layer w0.508: C19.1 169.639,75.336 170.029,74.946 170.029,74.933 170.7,74.262 v1(170.7,74.09)
  Bottom Layer w0.75: C7.1 C8.1 C9.1 C10.1
  Bottom Layer w1: C20.1 C17.1 C18.1 C19.1
GND: C1.1 C2.2 C3.2 C4.2 C5.2 C6.2 C7.2 C8.2 C9.2 C10.2 C11.2 C12.2 C13.1 C14.2 C15.2 C16.2 C17.2 C18.2 C19.2 C20.2 D2.1 D3.1 D4.1 D5.1 D6.1 D7.1 D9.1 D10.1 D11.1 D12.1 D13.1 D14.1 J1.5 M1.2 M2.2 M3.2 M3.5 M4.2 M4.5 M5.2 M5.5 M6.2 M6.5 R7.1 R8.1 R11.1 R12.1 R15.1 R16.1 R19.1 R20.1 R98.1 R99.1 U1.1 U1.2 U1.13 U2.7 U2.8 U3.7 U3.8 U4.1 U4.2 U4.13 | length 205.3
  Top Layer w0.254: D11.1 80.074,70.009 82.125,67.959 v1(82.125,67.775) ; v1(171.153,76.803) 171.213,76.803 171.515,76.5 J1.5
  Top Layer w0.508: v1(20.625,89.8) 20.641,89.816 22.484,89.816 D2.1 ; D3.1 22.503,70.328 24.347,70.328 v1(24.35,70.325) ; D9.1 v1(54,70) ; D4.1 52.066,89.766 53.834,89.766 v1(53.9,89.7) ; v1(78.1,90.2) 78.272,90.2 78.607,89.865 79.967,89.865 D10.1 ; D6.1 109.528,69.803 111.247,69.803 v1(111.275,69.775) ; D5.1 111.084,89.944 111.353,89.675 v1(111.525,89.675) ; v1(137.475,68.7) 137.487,68.712 137.487,70.319 D12.1 ; D7.1 137.594,89.825 139.137,89.825 v1(139.236,89.924) ; v1(165.025,70.375) 165.047,70.353 166.978,70.353 D14.1 ; v1(165.3,90.002) 165.383,89.918 167.042,89.918 D13.1
  Bottom Layer w0.254: U2.8 55.725,76.447 v1@56,76.172 ; v1@56.375,76.297 U2.7@56.375,77.8 ; v1(116.6,76.2) 116.725,76.325 U3.8 U3.7 ; C16.2 157.505,87.919 C16.2@157.511,87.925
  Bottom Layer w0.5: C4.2 94.086,90.56 C4.2@94.129,90.517 ; C3.2 94.129,88.293 C4.2@94.129,90.517 ; v1(95.925,89.899) 95.751,89.899 95.56,90.09 94.556,90.09 C4.2@94.129,90.517
  Bottom Layer w0.508: v1(35.1,77.075) 35.13,77.105 37.22,77.105 R11.1 ; R7.1 37,83.95 v1(37.675,83.275) 37.847,83.275 38.372,82.75 M3.2 ; M3.5 42.35,82.7 43.775,82.7 v1(43.825,82.65) ; v1(56,76) v1@56,76.172 ; C6.2 61.036,89.086 61.502,89.552 61.502,90.127 v1(62.275,90.9) 63.023,90.152 63.023,89.552 63.489,89.086 C5.2 ; v1(65.275,79.65) 65.293,79.633 67.433,79.633 R12.1 ; R8.1 67.476,82.974 v1(68.1,82.35) 68.175,82.425 69.625,82.425 M4.2 ; M4.5 72.338,82.462 73.888,82.462 v1(73.925,82.425) ; v1(81.125,74.575) 82.104,73.596 82.104,73.196 M1.2 ; R98.1 81.885,68.187 82.125,67.947 v1(82.125,67.775) ; C2.2 85.261,84.914 v1(86.9,83.275) 87.021,83.397 87.021,83.805 87.506,84.29 U1.13 ; U1.2 95.915,84.29 v1(96.55,84.925) 95.915,85.56 U1.1 ; C7.2 98.79,67.374 99.256,66.908 99.256,66.516 v1@99.9,65.872 ; v1(99.9,65.7) 100.022,65.822 100.022,66.486 100.91,67.374 C8.2 ; R19.1 99.675,79.615 v1@98.24,81.05 ; R15.1 99.675,82.135 98.762,81.222 98.247,81.222 v1(98.125,81.1) 98.19,81.1 v1@98.24,81.05 ; M5.2 102.4,81.05 v1@98.24,81.05 ; C9.2 103.79,67.374 104.593,66.571 104.593,66.263 v1(104.714,66.142) ; v1@104.679,65.872 v1@104.679,66.142 ; v1@104.8,65.872 105.444,66.516 105.444,66.908 105.91,67.374 C10.2 ; M5.5 105.112,80.938 106.487,80.938 v1(106.55,80.875) ; C11.2 123.175,89.176 123.175,89.675 123.178,89.675 123.853,90.35 v1(124.025,90.35) 124.147,90.228 124.147,89.75 125.06,88.836 C12.2 ; v1(126.625,77.9) 126.642,77.883 128.482,77.883 R20.1 ; v1(128.075,84.85) 128.092,84.867 129.982,84.867 R16.1 ; v1(130.5,81.175) 130.538,81.212 131.912,81.212 M6.2 ; M6.5 134.562,81.238 135.962,81.238 v1(135.975,81.225) ; R99.1 142.9,96.25 143.228,95.922 143.228,94.897 v1(143.35,94.775) 143.228,94.653 142.978,94.653 142.025,93.7 M2.2 ; C20.2 145.782,72.632 C17.2@148.278,72.632 ; v1(147.05,71.1) 147.172,71.222 147.172,71.526 C17.2@148.278,72.632 ; v1(147.125,83.1) 147.247,83.221 147.247,84.16 147.344,84.258 147.344,84.448 147.81,84.914 C13.1 148.19,84.914 148.814,84.29 U4.13 ; C17.2@148.5,72.632 153.75,72.632 153.884,72.498 155.678,72.498 v1(155.8,72.376) ; C17.2 148.31,72.664 C17.2@148.278,72.632 ; C14.2 151.005,87.919 157.505,87.919 159.501,87.919 159.632,88.05 v1(159.803,88.05) ; U4.2 156.646,84.361 157.302,84.361 157.341,84.4 v1@158.503,84.4 ; U4.1 157.075,85.56 157.395,85.24 157.663,85.24 v1@158.503,84.4 ; v1(158.888,84.613) 158.716,84.613 v1@158.503,84.4
MUX1_S0: J1.16 U2.11 | length 205.3
  Top Layer w0.2: v1(57.225,85.25) 57.127,85.152 54.518,85.152 53.4,86.269 53.4,87.181 54.121,87.902 55.681,87.902 56.079,88.3 69.353,88.3 70.454,89.402 78.995,89.402 79.266,89.13 80.734,89.13 81.005,89.402 95.293,89.402 95.594,89.1 96.256,89.1 96.557,89.402 108.716,89.402 109.241,88.876 121.422,88.876 124.967,92.421 138.258,92.421 139.655,91.024 139.692,91.024 139.731,90.985 141.765,90.985 142.95,89.8 150.747,89.8 155.903,94.956 157.897,94.956 159.306,93.547 159.306,92.267 169.574,82 J1.16
  Bottom Layer w0.2: U2.11 57.075,83.6 57.075,85.1 v1(57.225,85.25)
MUX1_S1: J1.15 U2.10 | length 207.8
  Top Layer w0.2: v1(55.825,85.95) 55.801,85.927 54.169,85.927 53.702,86.394 53.702,87.056 54.246,87.6 55.806,87.6 56.107,87.902 69.381,87.902 70.579,89.1 78.87,89.1 79.171,88.798 96.381,88.798 96.682,89.1 99.041,89.1 101.361,86.78 105.752,86.78 107.505,85.028 120.881,85.028 126.536,90.683 138.866,90.683 138.905,90.722 139.567,90.722 139.606,90.683 139.875,90.683 139.936,90.622 141.702,90.622 142.825,89.498 150.872,89.498 156.028,94.655 157.772,94.655 159.005,93.422 159.005,87.692 165.197,81.5 J1.15
  Bottom Layer w0.2: v1(55.825,85.95) 56.375,85.4 56.326,85.351 56.326,84.772 56.375,84.724 U2.10
MUX1_S2: J1.14 U2.9 | length 204.5
  Top Layer w0.3: v1(54.5,86.725) 54.594,86.819 55.521,86.819 56.253,87.55 74.725,87.55 75.924,88.748 78.724,88.748 79.026,88.447 96.526,88.447 96.828,88.748 98.895,88.748 101.215,86.429 105.607,86.429 107.359,84.677 125.326,84.677 128.503,87.854 129.116,87.854 130.036,88.774 134.969,88.774 135.69,89.495 136.221,89.495 136.741,88.974 138.249,88.974 138.35,89.075 150.946,89.075 156.174,94.303 157.626,94.303 158.653,93.276 158.653,87.547 165.2,81 J1.14
  Bottom Layer w0.2: v1(54.5,86.725) 54.5,85.4 55.725,84.175 U2.9
MUX2_S0: J1.13 U3.11 | length 139.6
  Top Layer w0.2: v1(117.45,80.675) 121.822,80.675 128.649,87.502 134.195,87.502 135.623,88.93 136.288,88.93 136.595,88.623 138.395,88.623 138.496,88.724 151.091,88.724 156.319,93.952 157.481,93.952 158.302,93.131 158.302,87.401 165.203,80.5 J1.13
  Bottom Layer w0.2: v1(117.45,80.675) 117.45,81.85 118,82.4 118,83.525 U3.11
MUX2_S1: J1.12 U3.10 | length 144.3
  Top Layer w0.2: v1(115.825,80.925) 116.874,79.877 121.45,79.877 128.774,87.201 134.32,87.201 135.748,88.628 136.163,88.628 136.47,88.321 138.52,88.321 138.621,88.422 152.069,88.422 153.222,89.575 153.222,90.428 156.444,93.65 157.356,93.65 158,93.006 158,84.372 162.372,80 J1.12
  Bottom Layer w0.2: v1(115.825,80.925) 117.375,82.475 U3.10
MUX2_S2: J1.11 U3.9 | length 152
  Top Layer w0.2: v1(114.327,81.425) 114.327,81.294 116.046,79.575 121.575,79.575 128.899,86.899 134.445,86.899 135.873,88.327 136.038,88.327 136.345,88.02 137.88,88.02 143.599,82.301 147.456,82.301 153.523,88.369 153.523,90.303 156.569,93.349 157.231,93.349 157.699,92.881 157.699,84.247 162.446,79.5 J1.11
  Bottom Layer w0.2: v1(114.327,81.425) 114.424,81.425 115.349,82.35 116.15,82.35 116.725,82.925 U3.9
MUX_EN: J1.10 U2.6 U3.6 | length 195.3
  Top Layer w0.2: v1(78.275,75.975) 111.8,75.975 v1(113.675,74.1) ; v1(142.225,77.9) 146.669,77.9 148.285,76.284 161.884,76.284 164.798,79.198 172.466,79.198 172.902,79.198 173.117,78.983 173.283,78.983 173.3,79 J1.10
  Bottom Layer w0.2: U2.6 57.025,77.325 59.75,74.6 76.9,74.6 v1(78.275,75.975) ; v1(113.675,74.1) 113.81,74.1 114.359,73.552 121.799,73.552 ; U3.6 118.025,77.325 121.799,73.552 ; v1(142.225,77.9) 139.775,77.9 135.427,73.552 121.799,73.552
NetD15_2: D15.2 R5.2 | length 8.5
  Top Layer w0.75: v1(47.325,88.5) 49.369,86.456 D15.2
  Bottom Layer w0.75: R5.2 45.308,88.558 47.268,88.558 v1(47.325,88.5)
NetD15_4: D15.4 R9.2 | length 14.6
  Top Layer w0.75: D15.4 51.309,85.484 v1(52.601,86.776)
  Bottom Layer w0.75: R9.2 45.325,80.365 51.71,86.75 52.575,86.75 v1(52.601,86.776)
NetD16_2: D16.2 R6.2 | length 7.6
  Top Layer w0.2: v1(76.275,87.9) 76.275,86.433 78.89,83.818 D16.2
  Bottom Layer w0.2: R6.2 74.584,87.9 v1(76.275,87.9)
NetD16_4: D16.4 R10.2 | length 15.3
  Top Layer w0.2: v1(79.25,86.074) 79.25,85.9 80.33,84.82 80.33,83.67 D16.4
  Bottom Layer w0.2: R10.2 74.849,76.52 75.199,76.87 75.199,78.915 79.25,82.966 v1(79.25,86.074)
NetD17_2: D17.2 R13.2 | length 10.9
  Top Layer w0.254: v1(102.85,85.4) 104.45,85.4 105.727,84.123 108.027,84.123 108.5,83.65 D17.2
  Bottom Layer w0.3: v1(102.85,85.4) 103.011,85.561 103.011,86.201 104.925,88.115 R13.2
NetD17_4: D17.4 R17.2 | length 11.2
  Top Layer w0.254: D17.4 110.441,82.352 110.914,81.879 111.796,81.879 v1(112.075,81.6)
  Bottom Layer w0.3: R17.2 105.575,77.365 109.81,81.6 v1(112.075,81.6)
NetD18_2: D18.2 R14.2 | length 7.4
  Top Layer w0.5: v1(136.6,87.221) 136.723,87.098 137.199,87.098 137.349,86.948 137.577,86.948 137.931,86.594 D18.2
  Bottom Layer w0.5: R14.2 134.95,87.915 136.034,87.915 136.6,87.349 v1(136.6,87.221)
NetD18_4: D18.4 R18.2 | length 14
  Top Layer w0.2: v1(132.967,74.449) 132.85,74.567 132.85,76.501 137.544,81.195 138.202,81.195 138.918,81.911 139.371,81.911 139.871,82.411 D18.4
  Bottom Layer w0.5: v1(132.967,74.449) 133,74.417 134.718,74.417 R18.2
NetM1_3: M1.3 R1.1 U1.12 | length 11.4
  Bottom Layer w0.3: M1.3 83.25,79.56 85.115,81.425 R1.1 87.155,81.75 88.425,83.02 U1.12
NetM2_3: M2.3 R3.1 U4.12 | length 29.8
  Bottom Layer w0.254: M2.3 144.5,90.9 142.208,88.608 142.208,79.405 142.536,79.077 142.713,79.077 142.865,78.925 143.475,78.925 145,80.45 R3.1 145.325,84.385 145.648,84.062 145.648,83.277 145.975,82.95 145.975,82.575 146.475,82.075 147.85,82.075 148.795,83.02 U4.12
NetM3_4: M3.4 R5.1 | length 3.8
  Bottom Layer w0.508: M3.4 43.562,83.7 44.729,84.867 44.729,85.189 44.925,85.385 R5.1
NetM3_6: M3.6 R9.1 | length 6
  Bottom Layer w0.3: M3.6 42.3,79.51 44.675,77.135 R9.1
NetM4_4: M4.4 R6.1 | length 2.9
  Bottom Layer w0.3: M4.4 73.25,83.45 73.924,84.124 73.924,84.335 74.224,84.635 R6.1
NetM4_6: M4.6 R10.1 | length 3
  Bottom Layer w0.3: M4.6 72.45,81.55 72.65,81.35 72.65,81.299 74.199,79.75 R10.1
NetM5_4: M5.4 R13.1 | length 3
  Bottom Layer w0.3: M5.4 105.05,84.685 R13.1
NetM5_6: M5.6 R17.1 | length 7.4
  Bottom Layer w0.3: M5.6 104.9,80.05 104.7,79.85 104.7,79.175 103.65,78.125 103.65,76.768 104.625,75.793 104.625,74.435 104.925,74.135 R17.1
NetM6_4: M6.4 R14.1 | length 2.8
  Bottom Layer w0.5: M6.4 134.65,82.2 134.75,82.3 R14.1
NetM6_6: M6.6 R18.1 | length 2.8
  Bottom Layer w0.5: M6.6 134.65,80.3 134.75,80.2 R18.1
NetR2_1: R2.1 U1.11 | length 5.2
  Bottom Layer w0.3: R2.1 85.115,79.075 87.65,81.61 88.785,81.61 U1.11
NetR4_1: R4.1 U4.11 | length 4.9
  Bottom Layer w0.254: R4.1 147.4,80.675 148.4,81.675 150.85,81.675 U4.11
TIA_IN_A: U1.3 U1.4 U2.3 | length 42
  Bottom Layer w0.2: U2.3 58.975,77.325 59.652,76.649 63.523,76.649 64.438,75.733 76.904,75.733 81.944,80.773 82.419,80.773 84.372,82.727 85.676,82.727 85.926,82.477 87.231,82.477 87.698,82.944 87.698,83.2 88.045,83.547 93.548,83.547 94.075,83.02 U1.3
  Bottom Layer w0.5: U1.4 U1.3
TIA_IN_B: U3.3 U4.3 U4.4 | length 43.2
  Bottom Layer w0.2: U3.3 119.975,77.325 121.977,75.323 126.004,75.323 127.344,73.983 131.372,73.983 134.352,76.963 135.609,76.963 137.344,78.698 142.556,78.698 142.658,78.596 146.893,78.596 149.52,81.223 151.805,81.223 152.332,81.75 U4.4
  Bottom Layer w0.3: U4.4 U4.3
TIA_OUT_A: D1.3 J1.8 U1.10 | length 188.1
  Top Layer w0.2: v1(156.35,65.875) 158.483,68.008 158.933,68.008 160.985,70.06 160.985,74.039 165.519,78.574 171.528,78.574 172.077,78.025 172.9,78.025 172.924,78.001 J1.8
  Bottom Layer w0.2: U1.10 88.425,80.48 85.874,77.929 85.874,76.914 83.548,74.588 83.548,69.806 84.581,68.773 86.652,68.773 91.381,73.503 D1.3 93.751,72.903 92.94,72.092 92.709,72.092 92.198,71.581 92.198,69.414 96.409,65.203 99.268,65.203 99.569,64.902 105.379,64.902 106.728,66.25 155.413,66.25 155.511,66.152 155.625,66.152 155.721,66.055 156.17,66.055 v1(156.35,65.875)
TIA_OUT_B: D8.3 J1.18 U4.10 | length 113.4
  Top Layer w0.2: v1(169.466,84.241) 170.706,83.001 172.466,83.001 234,83.001 J1.18
  Bottom Layer w0.2: U4.10 155.168,80.48 155.813,81.125 166.35,81.125 v1(169.466,84.241)
  Bottom Layer w0.203: D8.3 133.353,69.749 133.651,70.047 133.651,70.676 137.425,74.45 138.725,74.45 141.175,76.9 145.625,76.9 148.55,79.825 149.77,79.825 150.425,80.48 U4.10
TIA_RST_A: J1.9 M1.1 R98.2 | length 174.2
  Top Layer w0.2: v1(155.7,67.175) 155.7,69.181 165.394,78.875 172.466,78.875 172.476,78.875 172.974,78.377 234,78.377 234.233,78.377 234.28,78.425 239.175,78.425 J1.9
  Bottom Layer w0.2: M1.1 84.2,73.025 85.879,74.704 94.678,74.704 94.8,74.583 94.8,72.425 94.675,72.3 93.967,72.3 93.497,71.83 93.497,69.165 93.967,68.694 95.544,68.694 95.55,68.7 106.997,68.7 108.522,67.175 v1(155.7,67.175)
  Bottom Layer w0.3: M1.1 84.2,72.975 85.115,72.06 R98.2
TIA_RST_B: J1.17 M2.1 R99.2 | length 115.2
  Top Layer w0.203: v1(140.025,91.783) 141.396,91.783 142.254,90.925 147.7,90.925 150.425,93.65 154.168,93.65 155.778,95.26 158.022,95.26 159.61,93.672 159.61,92.965 170.075,82.5 172.466,82.5 234,82.5 J1.17
  Bottom Layer w0.203: R99.2 138.635,95.925 141.05,93.51 141.05,92.75 141.627,92.173 141.627,92.148 141.975,91.8 M2.1 141.725,91.525 141.725,91.685 141.627,91.783 v1(140.025,91.783)
pads on no net: D1.2 D8.2 U1.5 U1.6 U1.7 U1.8 U2.2 U2.4 U3.2 U3.4 U4.5 U4.6 U4.7 U4.8

## Polygon pours and split planes (outlines as drawn)
no net on Layer0 "Default Coverlay 4 Top" (split plane): 172.466,74 234,74 234,86.5 172.466,86.5
no net on Layer0 "Default Coverlay 4 Top" (split plane): 16.891,62.103 172.466,62.103 172.466,102.87 16.891,102.87
no net on Layer0 "Default Coverlay 4 Bottom" (split plane): 172.466,74 234,74 234,86.5 172.466,86.5
no net on Layer0 "Default Coverlay 4 Bottom" (split plane): 16.891,62.103 172.466,62.103 172.466,102.87 16.891,102.87
no net on Layer0 "Default Coverlay 2 Top" (split plane): 244.5,86.5 234,86.5 234,74 244.5,74
no net on Layer0 "Default Coverlay 2 Bottom" (split plane): 244.5,86.5 234,86.5 234,74 244.5,74
GND on Layer 1 "GND_L02_P000" (hatched Horizontal grid 0.508 track 0.203, pour order 0): 16.891,102.87 172.466,102.87 172.466,62.103 16.891,62.103
GND on Layer 2 "GND_L03_P002" (hatched Horizontal grid 0.508 track 0.203, pour order 2): 17,102.87 172.466,102.87 172.466,62.103 16.891,62.103 16.891,102.87

## Silkscreen, mask and mechanical layers (free items; w line width, h text height)
Flex Top Overlay 1:
  drawing of 49 lines, arcs and shapes, not listed